# Altium PCB PCB.PcbDoc
Units mm, origin at the board's own origin, x right, y up, seen from the top; angles counter-clockwise.
Board outline 68.58 x 53.34 mm, 2 copper layers (Top Layer, Bottom Layer); 24 components, 23 nets, 88 pads, 0 vias.
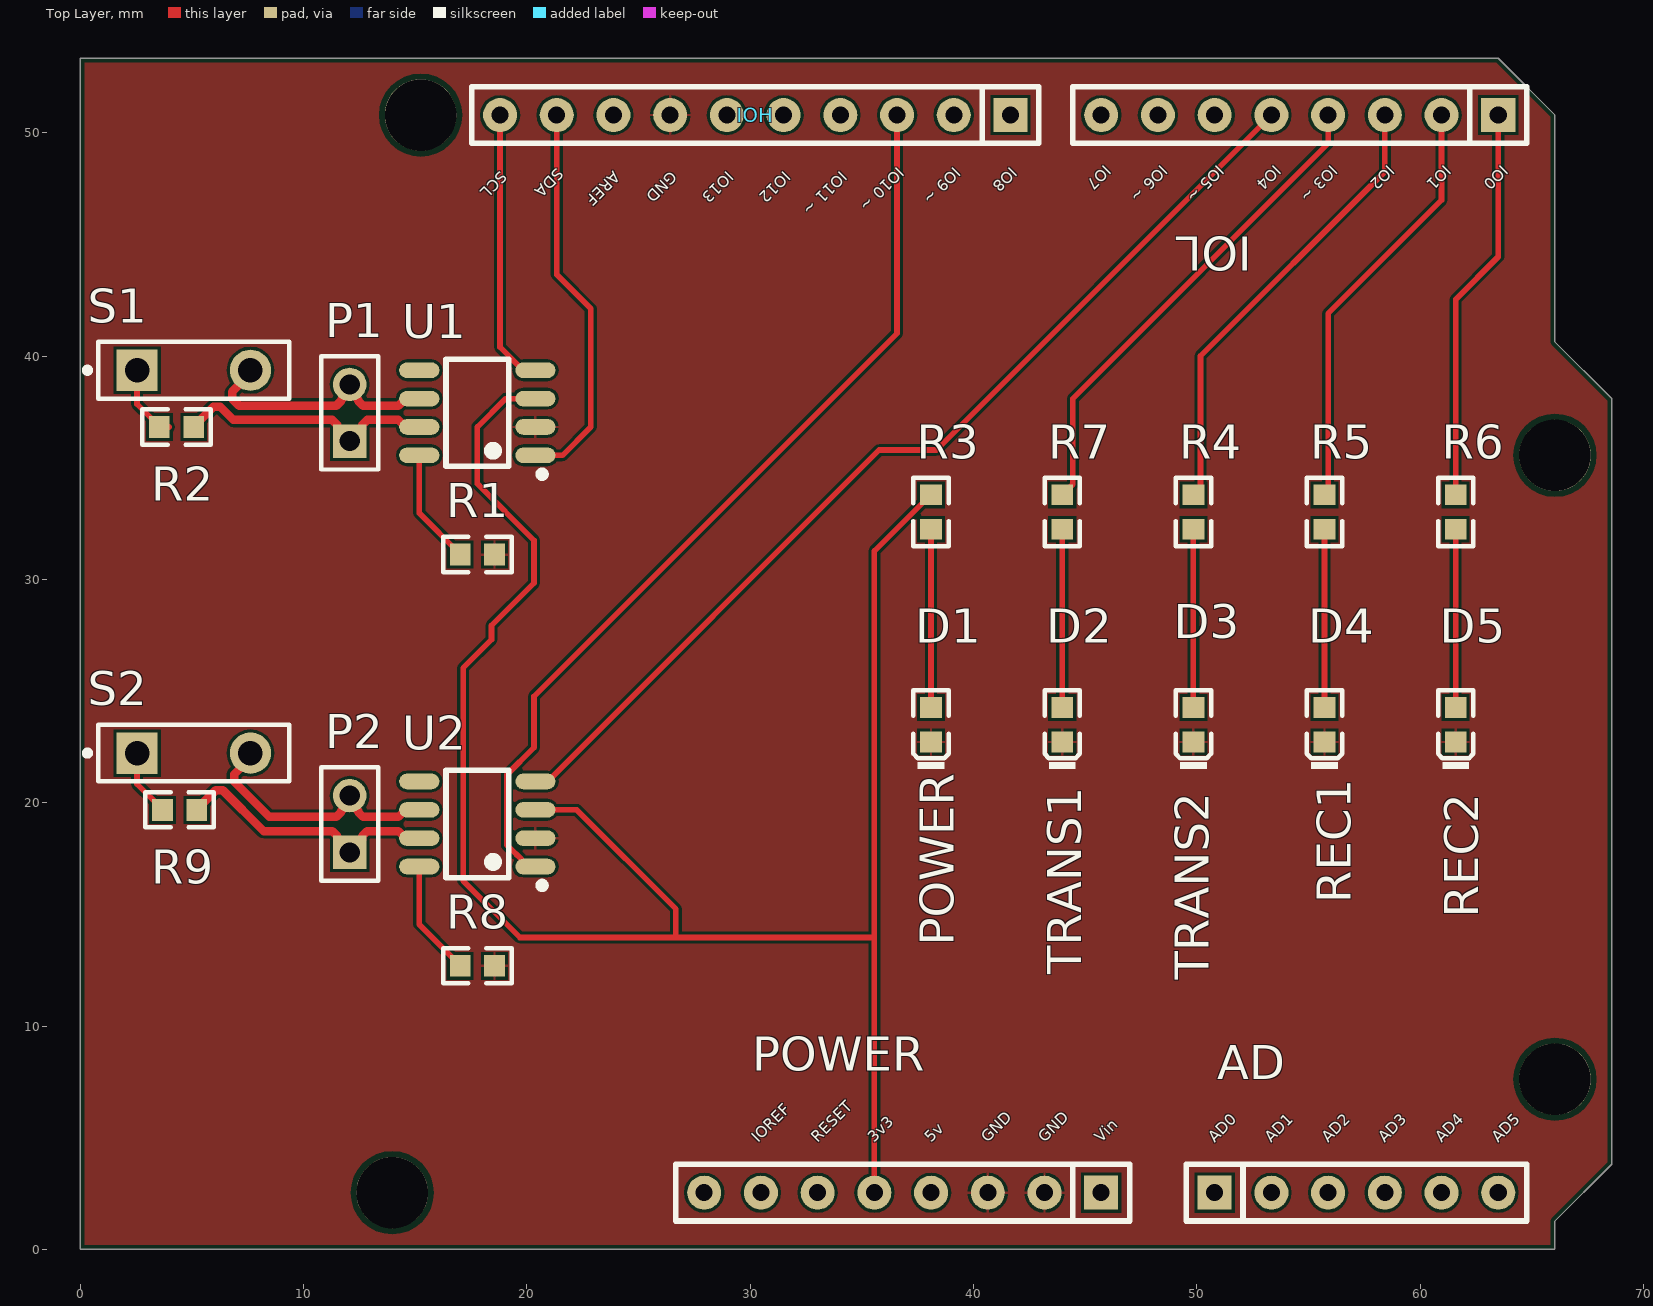
[diagram p0: Top Layer view]
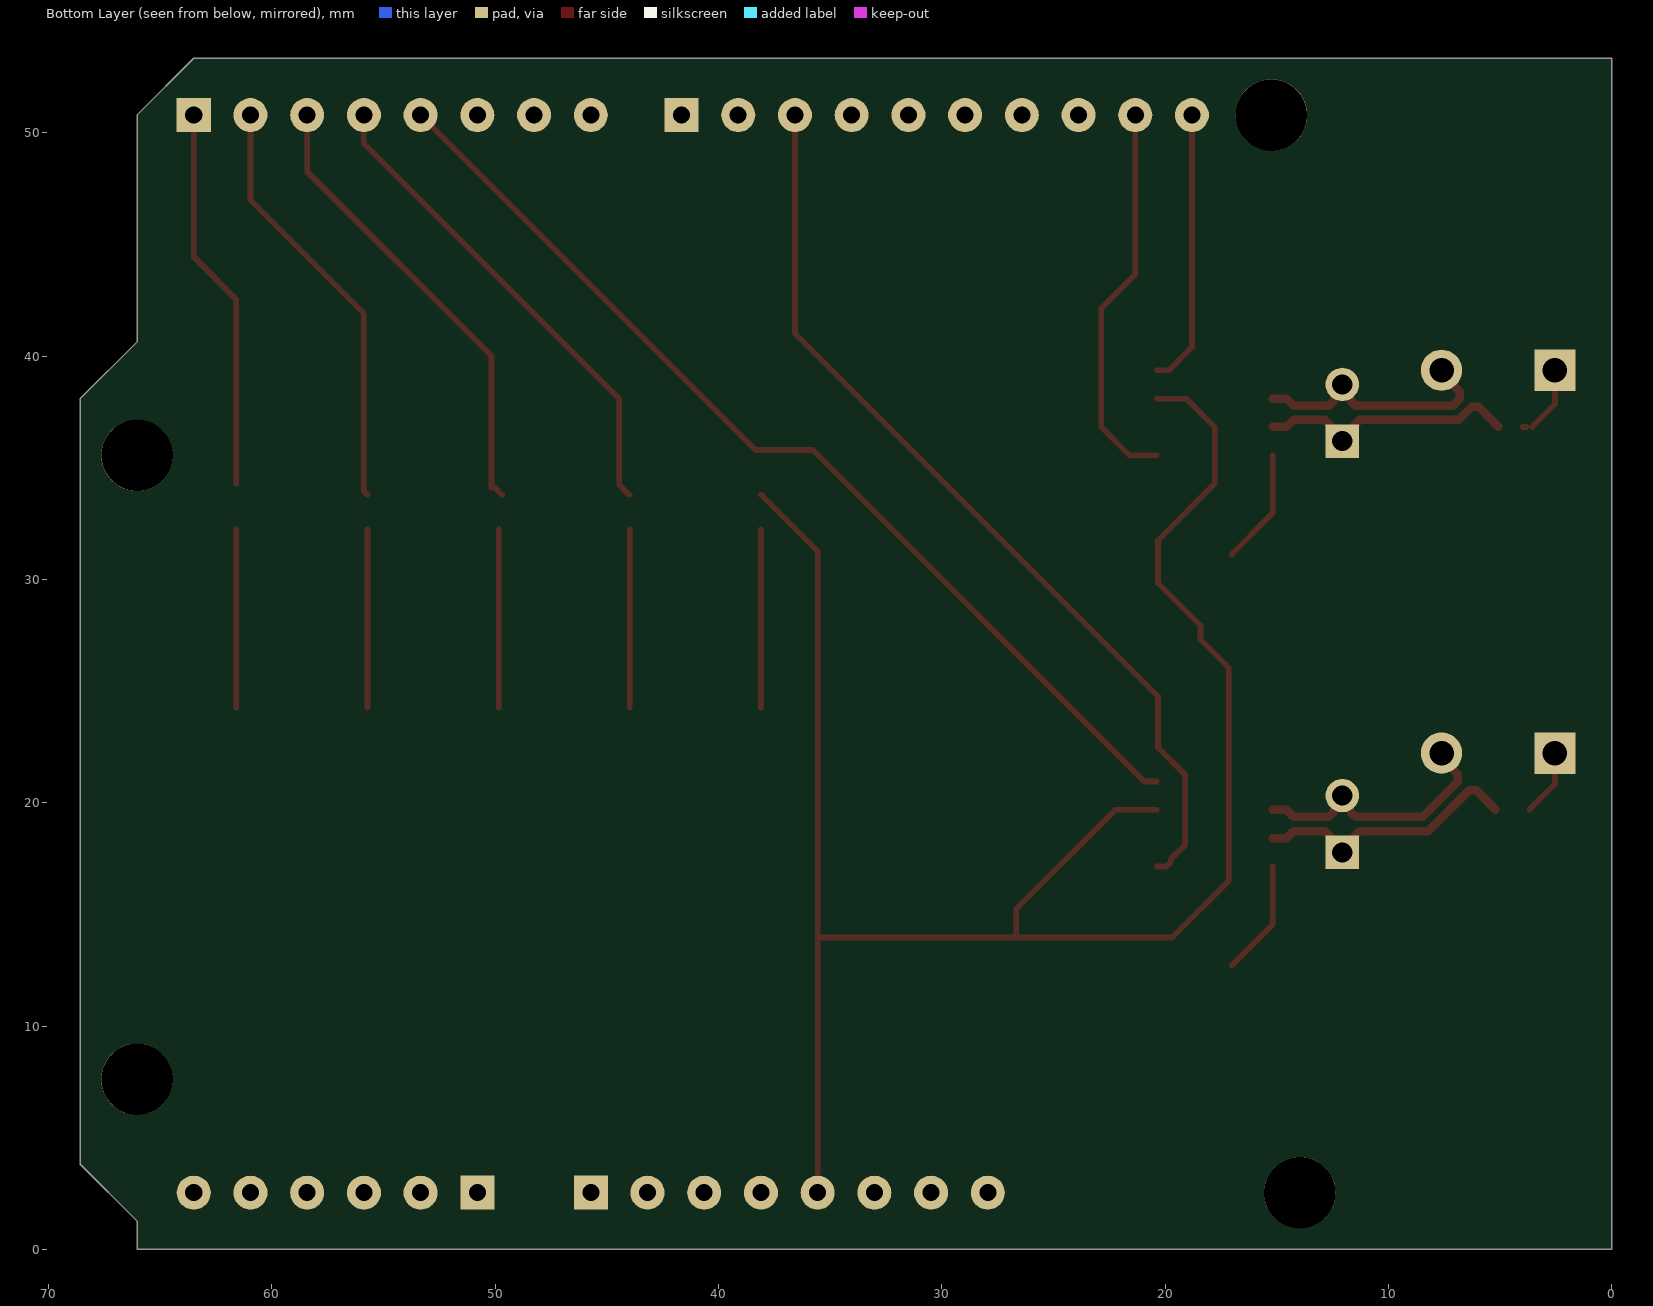
[diagram p1: Bottom Layer view, seen from below]
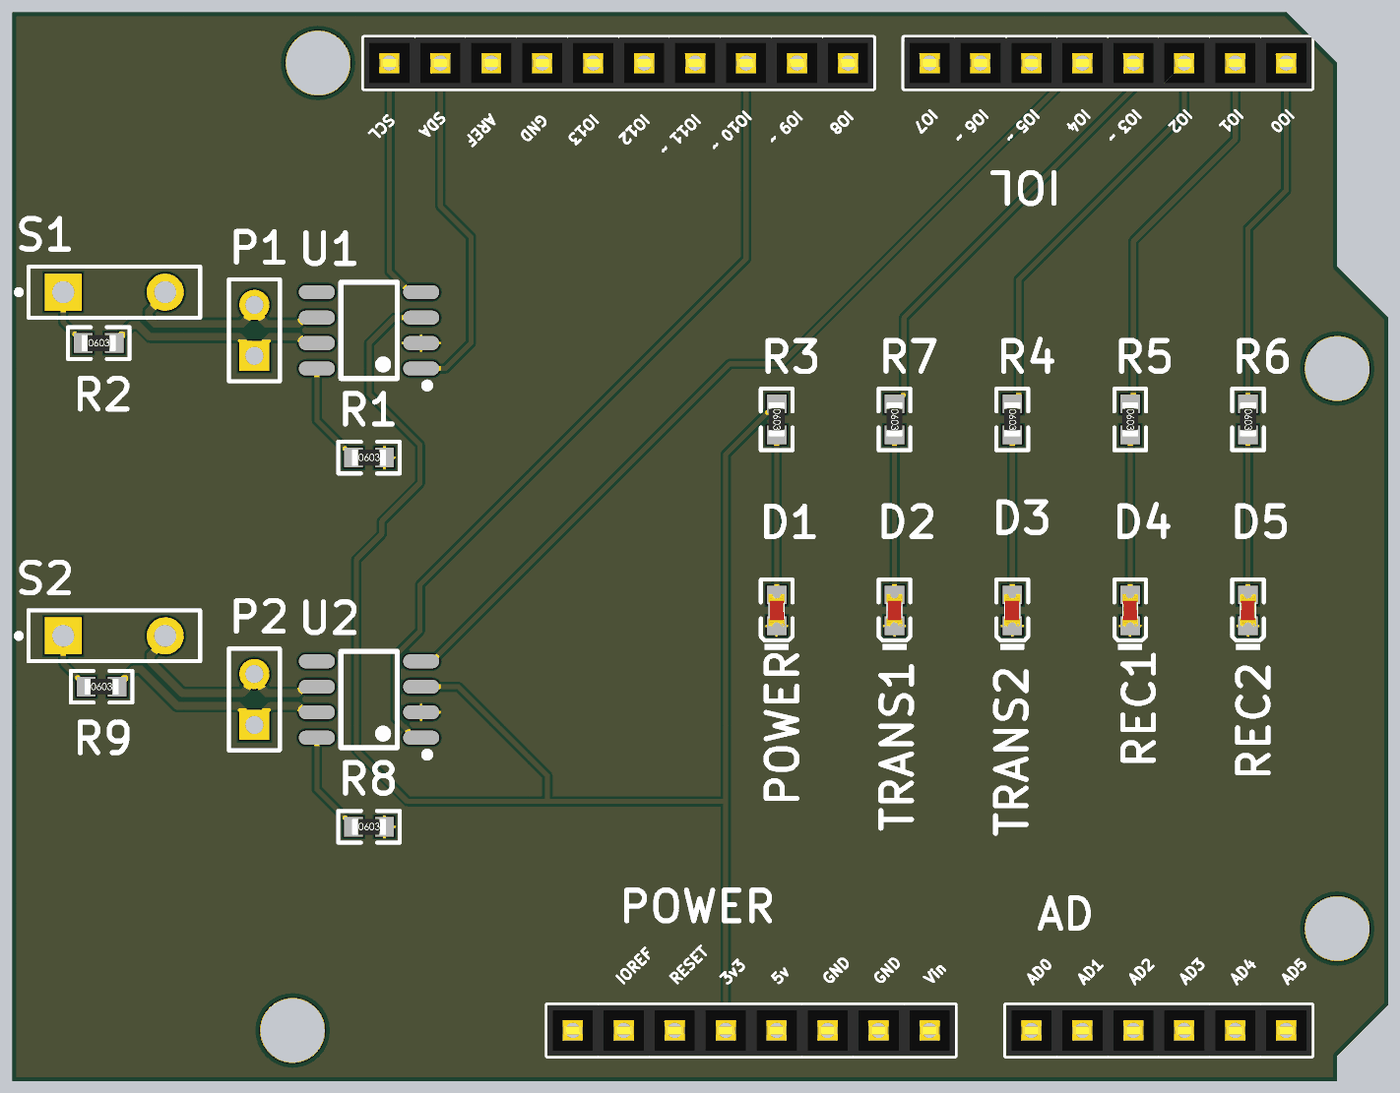
[diagram p2: 3D render of the assembled board from above, using the file's embedded part models]

## Layer stack, top to bottom
Top Solder: solder mask 0.0102, Solder Resist, Dk 3.5
Top Layer: signal copper 0.0356
Dielectric1: dielectric 0.32, FR-4, Dk 4.8
Bottom Layer: signal copper 0.0356
Bottom Solder: solder mask 0.0102, Solder Resist, Dk 3.5

## Board outline
0,0 0,53.34 63.5,53.34 66.04,50.8 66.04,40.64 68.58,38.1 68.58,3.81 66.04,1.27 66.04,0

## Design rules (kind name [scope] priority, off if disabled: settings)
BoardOutlineClearance [All] p1: gap=0.2 ignorepadtopadclearanceinfootprint=FALSE
Clearance [All] p1: gap=0.127 ignorepadtopadclearanceinfootprint=FALSE except(0.25: Arc-Hole Track-Hole SMDPad-Hole THPad-Hole Via-Hole Fill-Hole Poly-Hole Region-Hole Text-Hole)
ComponentClearance [All] p1: gap=0.127 collisioncheckmode=3 verticalgap=0.127 showdistances=TRUE
DiffPairsRouting [All] p1: maxlimit=0.254 minlimit=0.127 mostfreqgap=0.127 toplayer_minwidth=0.127 toplayer_maxwidth=25.4 toplayer_prefwidth=0.127 bottomlayer_minwidth=0.127 bottomlayer_maxwidth=25.4 bottomlayer_prefwidth=0.127 maxuncoupledlength=12.7
Height [All] p1: minheight=0 maxheight=1816.048 prefheight=12.7
HoleSize [All] p1: absolutevalues=TRUE maxlimit=6.3 minlimit=0.3 maxpercent=80.000 minpercent=20.000
HoleToHoleClearance [All] p1: gap=0.25 allowstackedmicrovias=FALSE
MinimumAnnularRing [All] p1: minimumring=0.076
MinimumSolderMaskSliver [All] p1: minsoldermaskwidth=0
PlaneClearance [All] p1: clearance=0.127
PlaneConnect PlaneConnectPowerPads [InPadClass('PowerPads')] p1: planeconnectstyle=Direct reliefexpansion=0.508 reliefentries=4 reliefconductorwidth=0.254 reliefairgap=0.254
PlaneConnect [All] p2: pad.planeconnectstyle=Relief pad.reliefexpansion=0.3 pad.reliefentries=4 pad.reliefconductorwidth=0.127 pad.reliefairgap=0.127 via.planeconnectstyle=Direct via.reliefexpansion=0.3 via.reliefentries=4 via.reliefconductorwidth=0.127 via.reliefairgap=0.127
PolygonConnect PolygonConnectPowerPads [All vs (InPadClass('PowerPads'))] p1: connectstyle=Direct reliefconductorwidth=0.254 reliefentries=4 polygonreliefangle="90 Angle" airgapwidth=0.254
PolygonConnect [All] p2: thpad.connectstyle=Relief thpad.reliefconductorwidth=0.127 thpad.reliefentries=4 thpad.polygonreliefangle="90 Angle" thpad.airgapwidth=0.127 smdpad.connectstyle=Relief smdpad.reliefconductorwidth=0.127 smdpad.reliefentries=4 smdpad.polygonreliefangle="90 Angle" smdpad.airgapwidth=0.127 via.connectstyle=Direct via.reliefconductorwidth=0.127 via.reliefentries=4 via.polygonreliefangle="90 Angle" via.airgapwidth=0.127
RoutingVias [All] p1: holewidth=0.3 width=0.6 viastyle="Through Hole" minholewidth=0.3 minwidth=0.6 maxholewidth=0.6 maxwidth=6.6
SilkToSilkClearance [All] p1: silktosilkclearance=0
SilkToSolderMaskClearance [IsPad] p1: minsilkscreentomaskgap=0.127 clearancetoexposedcopper=TRUE
SolderMaskExpansion [All] p1: expansion=0.075 istentingtop=FALSE
Width [All] p1: maxlimit=25.4 minlimit=0.127 preferedwidth=0.127 minimp=50.000000 maximp=50.000000 favimp=50.000000
20 further rules are at their usual default settings.

## Classes and differential pairs
differential pair CAN2: +CAN2_P -CAN2_N
differential pair CAN1: +CAN1_P -CAN1_N

## Components (designator, comment, footprint, x,y, rotation, side; value= is the part's Value field where it differs from the comment)
AD "AD" "Header 6x1 8.5mm" 50.8,2.54 r0 top locked
D1 "0603 Red" 0603_LED_S1 38.1,23.495 r90 top
D2 "0603 Blue" 0603_LED_S1 43.974,23.495 r90 top
D3 "0603 Blue" 0603_LED_S1 49.847,23.495 r90 top
D4 "0603 Green" 0603_LED_S1 55.721,23.495 r90 top
D5 "0603 Green" 0603_LED_S1 61.595,23.495 r90 top
IOH "IOH" "Header 10x1 8.5mm" 41.656,50.8 r180 top locked
IOL "IOL" "Header 8x1 8.5mm" 63.5,50.8 r180 top locked
P1 "Header 2" HDR1X2 12.065,36.195 r90 top
P2 "Header 2" HDR1X2 12.065,17.78 r90 top
POWER "POWER_UNO" "Header 8x1 8.5mm" 45.72,2.54 r180 top locked
R1 "10KΩ ±1%" 0603_R 17.78,31.115 r0 top
R2 "120Ω ±1%" 0603_R 4.31,36.83 r0 top
R3 "300Ω ±1%" 0603_R 38.1,33.02 r270 top
R4 "300Ω ±1%" 0603_R 49.847,33.02 r270 top
R5 "300Ω ±1%" 0603_R 55.721,33.02 r270 top
R6 "300Ω ±1%" 0603_R 61.595,33.02 r270 top
R7 "300Ω ±1%" 0603_R 43.974,33.02 r270 top
R8 "10KΩ ±1%" 0603_R 17.78,12.7 r0 top
R9 "120Ω ±1%" 0603_R 4.445,19.685 r0 top
S1 "SW-PB" SPST-2 5.08,39.37 r0 top
S2 "SW-PB" SPST-2 5.08,22.225 r0 top
U1 "CAN/SN65HVD230DR" SOIC-8_150mil 17.78,37.465 r90 top
U2 "CAN/SN65HVD230DR" SOIC-8_150mil 17.78,19.05 r90 top

## Footprints (in the part's own frame and the unit in brackets; to place one, negate y for a bottom-side part, rotate by r counter-clockwise, add the part's x,y. Pads: shape width x height; smd on the part's side, far side on the other; paste and mask are expansions set on the pad)
0603_LED_S1 [mm]
  rect 0.93x0.98 smd: A(0.77,0) K(-0.77,0)
  silkscreen extent -1.98,-0.79 1.54,0.79, body extent -0.8,-0.4 0.8,0.4, height 0.6
0603_R [mm]
  rect 0.93x0.98 smd: 1(-0.77,0) 2(0.77,0)
  silkscreen extent -1.53,-0.79 1.54,0.79, body extent -0.85,-0.4 0.85,0.4, height 0.56
HDR1X2 [mm] "Connector; Header; 2 Position"
  rect 1.5x1.5 hole 0.9: 1(0,0)
  round 1.5 hole 0.9: 2(2.54,0)
  silkscreen extent -1.27,-1.27 3.81,1.27
"Header 6x1 8.5mm" [mil] "Stackable 6 pin header"
  rect 60x60 hole 30: 1(0,0)
  round 60 hole 30: 2(100,0) 3(200,0) 4(300,0) 5(400,0) 6(500,0)
  silkscreen extent -50,-50 550,50, body extent -50,-50 550,50, height 335
"Header 8x1 8.5mm" [mil] "Stackable 8 pin header"
  rect 60x60 hole 30: 1(0,0)
  round 60 hole 30: 2(100,0) 3(200,0) 4(300,0) 5(400,0) 6(500,0) 7(600,0) 8(700,0)
  silkscreen extent -50,-50 750,50, body extent -50,-50 750,50, height 335
"Header 10x1 8.5mm" [mil] "Stackable 10 pin header"
  rect 60x60 hole 30: 1(0,0)
  round 60 hole 30: 2(100,0) 3(200,0) 4(300,0) 5(400,0) 6(500,0) 7(600,0) 8(700,0) 9(800,0) 10(900,0)
  silkscreen extent -50,-50 950,50, body extent -50,-50 950,50, height 335
SOIC-8_150mil [mm]
  oval 0.7x1.8 smd: 1(-1.905,-2.6) 2(-0.635,-2.6) 3(0.635,-2.6) 4(1.905,-2.6) 5(1.905,2.6) 6(0.635,2.6) 7(-0.635,2.6) 8(-1.905,2.6)
  silkscreen extent -2.9,-3.05 2.4,1.4
SPST-2 [mm] "Switch; 2 Leads"
  rect 1.85x1.85 hole 1.1: 1(-2.54,0)
  round 1.85 hole 1.1: 2(2.54,0)
  silkscreen extent -4.89,-1.27 4.28,1.27

## Part data
AD: Supplier Part Number 1=2699089, Supplier 1=Arrow, Supplier 2=Digi-Key, Supplier 3=Arrow, Supplier 4=Arrow, Supplier Part Number 2=SAM1198-06-ND, Supplier Part Number 3=2699088, Supplier Part Number 4=2699075
D1: library part "0603 LED Red", "LED", Color=Red, Package=0603, SuppliersPartNumber=C2286, ComponentLink1Description=供应商链接, ComponentLink1URL=http://www.szlcsc.com/product/details_2659.html, Supplier=LC
D2 D3: library part "0603 LED Blue", "LED", Color=Blue, Package=0603, SuppliersPartNumber=C72041, ComponentLink1Description=供应商链接, ComponentLink1URL=http://www.szlcsc.com/product/details_73150.html, Supplier=LC
D4 D5: library part "0603 LED Green", "LED", Color=Green, Package=0603, SuppliersPartNumber=C72043, ComponentLink1Description=供应商链接, ComponentLink1URL=http://www.szlcsc.com/product/details_73152.html, Supplier=LC
IOH: Supplier Part Number 1=2698803S4475693N1004, Supplier 1=Arrow, Supplier 2=Digi-Key, Supplier 3=Arrow, Supplier Part Number 2=SAM1198-10-ND, Supplier Part Number 3=2698789
IOL POWER: Supplier Part Number 1=SAM1198-08-ND, Supplier 1=Digi-Key, Supplier 2=Arrow, Supplier 3=Arrow, Supplier 4=Arrow, Supplier Part Number 2=2698939, Supplier Part Number 3=2698940, Supplier Part Number 4=2698925
P1 P2: "Header, 2-Pin", LatestRevisionDate=17-Jul-2002, LatestRevisionNote="Re-released for DXP Platform.", Publisher="Altium Limited"
R1 R8: library part "0603 10K (1002) 1%", "Chip resistor", Manufacturer="Uniroyal Elec", Package=0603, PartNumber=0603WAF1002T5E, Power=1/10W, Resistance=10KΩ, SuppliersPartNumber=C25804, Tolerance=1%, ComponentLink1Description="Supplier link", ComponentLink1URL=http://www.szlcsc.com/product/details_26547.html, Supplier=LC
R2 R9: library part "0603 120R (1200) 1%", "Chip resistor", Manufacturer="Uniroyal Elec", Package=0603, PartNumber=0603WAF1200T5E, Power=1/10W, Resistance=120Ω, SuppliersPartNumber=C22787, Tolerance=1%, ComponentLink1Description="Supplier link", ComponentLink1URL=http://www.szlcsc.com/product/details_23514.html, Supplier=LC
R3 R4 R5 R6 R7: library part "0603 300R (3000) 1%", "Chip resistor", Manufacturer="Uniroyal Elec", Package=0603, PartNumber=0603WAF3000T5E, Power=1/10W, Resistance=300Ω, SuppliersPartNumber=C23025, Tolerance=1%, ComponentLink1Description="Supplier link", ComponentLink1URL=http://www.szlcsc.com/product/details_23752.html, Supplier=LC
S1 S2: "Switch", LatestRevisionDate=17-Jul-2002, LatestRevisionNote="Re-released for DXP Platform.", PackageDescription="Switch; 2 Leads", PackageReference=SPST-2, Published=24-Mar-1999, Publisher="Altium Limited"
U1 U2: library part CAN/SN65HVD230DR_[C12084], "CAN", Package=SOIC-8_150mil, SuppliersPartNumber=C12084, ComponentLink1Description=供应商链接, ComponentLink1URL=http://www.szlcsc.com/product/details_12661.html, Supplier=LC

## Free pads (board coordinates)
  round 3.2 hole 3.2: 0(13.97,2.54) 0(15.24,50.8) 0(66.04,7.62) 0(66.04,35.56)

## Nets (pads, with @x,y where several pads share a name; then routed paths per layer and width w, separated by ;. In a path a pad name is that pad's centre, name@x,y a point inside that pad or via, vN(x,y) a via of type N, cw(c..) or ccw(c..) an arc to the next point about the centre after c; other vN are vias at no path point)
3V3: POWER.5 R3.1 U1.3 U2.3 | length 87
  Top Layer w0.254: U2.3 22.225,19.685 26.67,15.24 26.67,13.97 ; U1.3 19.05,38.1 17.78,36.83 17.78,34.29 20.32,31.75 20.32,29.845 18.415,27.94 18.415,27.305 17.145,26.035 17.145,16.51 19.685,13.97 26.67,13.97 ; POWER.5 35.56,13.97 ; R3.1 38.075,33.79 35.56,31.275 35.56,13.97 ; 26.67,13.97 35.56,13.97
CAN1_N: P1.2 S1.2 U1.6 | length 11.1
  Top Layer w0.381: S1.2 7.62,39.23 6.802,38.412 6.802,38.097 7.117,37.782 11.464,37.782 11.687,38.006 11.687,38.055 P1.2@12.065,38.432 ; P1.2 P1.2@12.065,38.432 ; U1.6 14.565,38.1 14.247,37.782 12.666,37.782 12.443,38.006 12.443,38.055 P1.2@12.065,38.432
CAN1_P: P1.1 R2.2 U1.7 | length 11.8
  Top Layer w0.381: R2.2 5.08,36.855 5.955,37.73 6.271,37.73 6.853,37.148 11.282,37.148 11.505,36.924 11.505,36.755 P1.1 12.625,36.755 12.625,36.924 12.848,37.148 14.247,37.148 14.565,36.83 U1.7
CAN2_N: P2.2 S2.2 U2.6 | length 11.6
  Top Layer w0.381: S2.2 7.62,22 6.887,21.267 6.887,20.952 8.472,19.367 11.464,19.367 11.687,19.591 11.687,19.64 P2.2@12.065,20.017 ; P2.2 P2.2@12.065,20.017 ; U2.6 14.565,19.685 14.247,19.367 12.666,19.367 12.443,19.591 12.443,19.64 P2.2@12.065,20.017
CAN2_P: P2.1 R9.2 U2.7 | length 12.2
  Top Layer w0.381: R9.2 5.215,19.71 6.065,20.56 6.381,20.56 8.209,18.732 11.282,18.732 11.505,18.509 11.505,18.34 P2.1 12.625,18.34 12.625,18.509 12.848,18.732 14.247,18.732 14.565,18.415 U2.7
D(CAN1): IOH.9 U1.1 | length 17.6
  Top Layer w0.254: U1.1 21.59,35.56 22.86,36.83 22.86,42.13 21.336,43.654 IOH.9
D(CAN2): IOH.3 U2.1 | length 41.7
  Top Layer w0.254: U2.1 19.951,17.145 19.745,17.351 19.745,17.485 19.546,17.684 19.527,17.684 19.099,18.112 19.099,21.258 20.32,22.479 20.32,24.765 36.576,41.021 IOH.3
GND: D1.K D2.K D3.K D4.K D5.K IOH.7 POWER.2 POWER.3 R1.2 R8.2 U1.2 U2.2
NetD1_A: D1.A R3.2 | length 8
  Top Layer w0.254: D1.A R3.2
NetD2_A: D2.A R7.2 | length 8
  Top Layer w0.254: D2.A R7.2
NetD3_A: D3.A R4.2 | length 8
  Top Layer w0.254: D3.A R4.2
NetD4_A: D4.A R5.2 | length 8
  Top Layer w0.254: D4.A R5.2
NetD5_A: D5.A R6.2 | length 8
  Top Layer w0.254: D5.A R6.2
NetR1_1: R1.1 U1.8 | length 5.2
  Top Layer w0.254: U1.8 15.18,32.97 17.01,31.14 R1.1
NetR2_1: R2.1 S1.1 | length 3.1
  Top Layer w0.254: S1.1 2.54,37.855 3.54,36.855 R2.1 ; R2.1@3.81,36.83 R2.1@3.972,36.83
NetR8_1: R8.1 U2.8 | length 5.2
  Top Layer w0.254: U2.8 15.18,14.555 17.01,12.725 R8.1
NetR9_1: R9.1 S2.1 | length 3
  Top Layer w0.254: S2.1 2.54,20.845 3.675,19.71 R9.1
R1flag: IOL.2 R5.1 | length 19.2
  Top Layer w0.254: R5.1 55.88,33.949 55.88,41.91 60.96,46.99 IOL.2
R2flag: IOL.1 R6.1 | length 17.3
  Top Layer w0.254: 61.595,34.29 61.595,42.545 63.5,44.45 IOL.1
R(CAN1): IOH.10 U1.4 | length 12.4
  Top Layer w0.254: IOH.10 18.796,40.404 19.83,39.37 U1.4
R(CAN2): IOL.5 U2.4 | length 45.3
  Top Layer w0.254: U2.4 20.93,20.955 35.774,35.799 38.339,35.799 IOL.5
T1flag: IOL.4 R7.1 | length 22
  Top Layer w0.254: R7.1 43.999,33.79 44.337,34.128 44.337,34.153 44.45,34.266 44.45,38.1 55.88,49.53 IOL.4
T2flag: IOL.3 R4.1 | length 20.6
  Top Layer w0.254: R4.1@49.689,33.79 R4.1@50.006,34.107 ; R4.1@50.165,34.107 50.165,40.005 58.42,48.26 IOL.3
pads on no net: AD.1 AD.2 AD.3 AD.4 AD.5 AD.6 IOH.1 IOH.2 IOH.4 IOH.5 IOH.6 IOH.8 IOL.6 IOL.7 IOL.8 POWER.1 POWER.4 POWER.6 POWER.7 POWER.8 U1.5 U2.5

## Polygon pours and split planes (outlines as drawn)
GND on Top Layer "GND_L01_P000" (solid, remove dead copper, pour order 0): 0,0 0,53.34 63.5,53.34 66.04,50.8 66.04,40.64 68.58,38.1 68.58,3.81 66.04,1.27 66.04,0

## Silkscreen, mask and mechanical layers (free items; w line width, h text height)
Top Overlay:
  text "IO7" at 45.847,48.588 h0.51 r225
  text "IO6 ~" at 48.387,48.588 h0.51 r225
  text "IO5 ~" at 50.927,48.588 h0.51 r225
  text "IO4" at 53.467,48.588 h0.51 r225
  text "IO3 ~" at 56.007,48.588 h0.51 r225
  text "IO2" at 58.547,48.588 h0.51 r225
  text "IO1" at 61.087,48.588 h0.51 r225
  text "IO0" at 63.627,48.588 h0.51 r225
  text "IO10 ~" at 36.576,48.514 h0.51 r225
  text "IO9 ~" at 39.116,48.514 h0.51 r225
  text "IO8" at 41.656,48.514 h0.51 r225
  text "SDA" at 21.336,48.461 h0.51 r225
  text "SCL" at 18.796,48.334 h0.51 r225
  text "AREF" at 23.876,48.334 h0.51 r225
  text "GND" at 26.416,48.334 h0.51 r225
  text "IO13" at 28.956,48.334 h0.51 r225
  text "IO12" at 31.496,48.334 h0.51 r225
  text "IO11 ~" at 34.036,48.334 h0.51 r225
  text "REC1" at 56.896,15.494 h1.52 r90
  text "REC2" at 62.611,14.859 h1.52 r90
  text "POWER" at 39.116,13.589 h1.52 r90
  text "TRANS1" at 44.831,12.319 h1.52 r90
  text "TRANS2" at 50.546,12.065 h1.52 r90
  text "IOREF" at 30.353,4.752 h0.51 r45
  text "RESET" at 33.02,4.752 h0.51 r45
  text "3v3" at 35.56,4.752 h0.51 r45
  text "5v" at 38.1,4.752 h0.51 r45
  text "GND" at 40.64,4.752 h0.51 r45
  text "GND" at 43.18,4.752 h0.51 r45
  text "Vin" at 45.72,4.752 h0.51 r45
  text "AD0" at 50.8,4.752 h0.51 r45
  text "AD1" at 53.34,4.752 h0.51 r45
  text "AD2" at 55.88,4.752 h0.51 r45
  text "AD3" at 58.42,4.752 h0.51 r45
  text "AD4" at 60.96,4.752 h0.51 r45
  text "AD5" at 63.5,4.752 h0.51 r45
Mechanical 1:
  circle w0.127: c15.24,50.8 r1.6
  circle w0.127: c66.04,7.62 r1.6
  circle w0.127: c13.97,2.54 r1.6
  circle w0.127: c66.04,35.56 r1.6
  lines w0.127: 0,0 0,53.34 63.5,53.34 66.04,50.8 66.04,40.64 68.58,38.1 68.58,3.81 66.04,1.27 66.04,0 0,0